# Altium PCB Hilt-Side PCB.PcbDoc
Units mil, origin at the board's own origin, x right, y up, seen from the top; angles counter-clockwise.
Board outline 807.09 x 801.66 mil, 4 copper layers (Top Layer, Mid Layer 1, Mid Layer 2, Bottom Layer), stack 61.811 mil thick; 22 components, 3 nets, 22 pads, 0 vias.
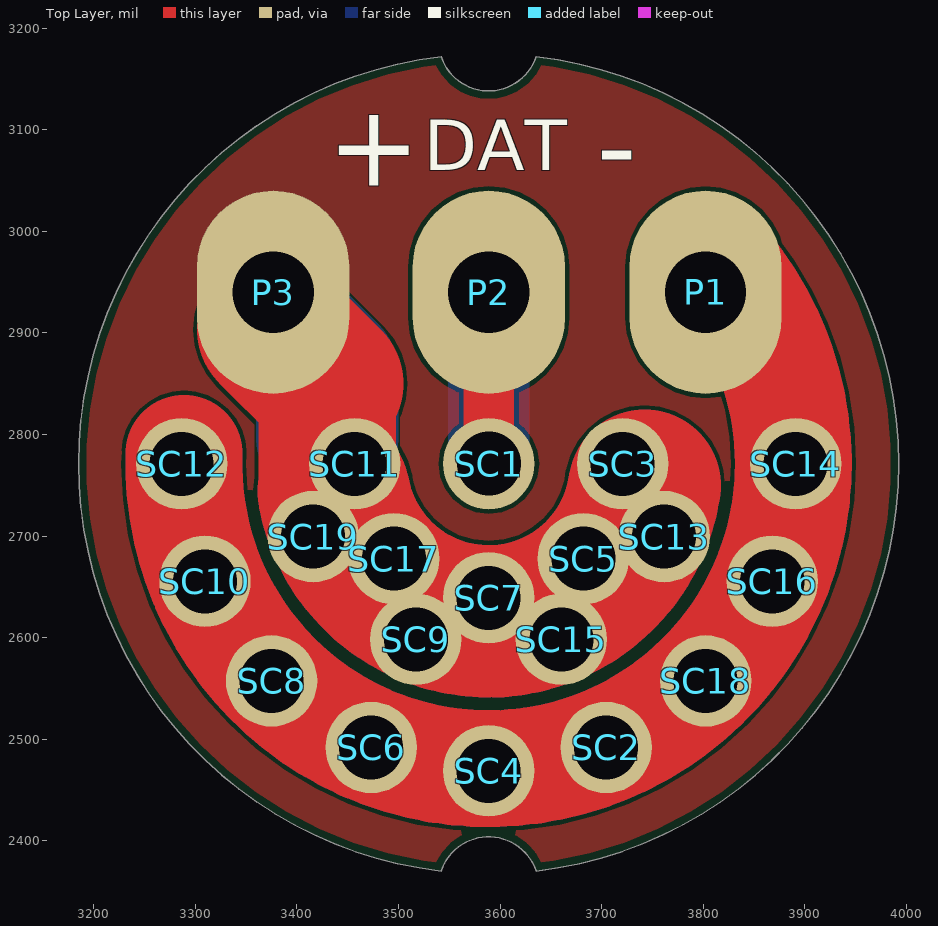
[diagram p0: Top Layer view]
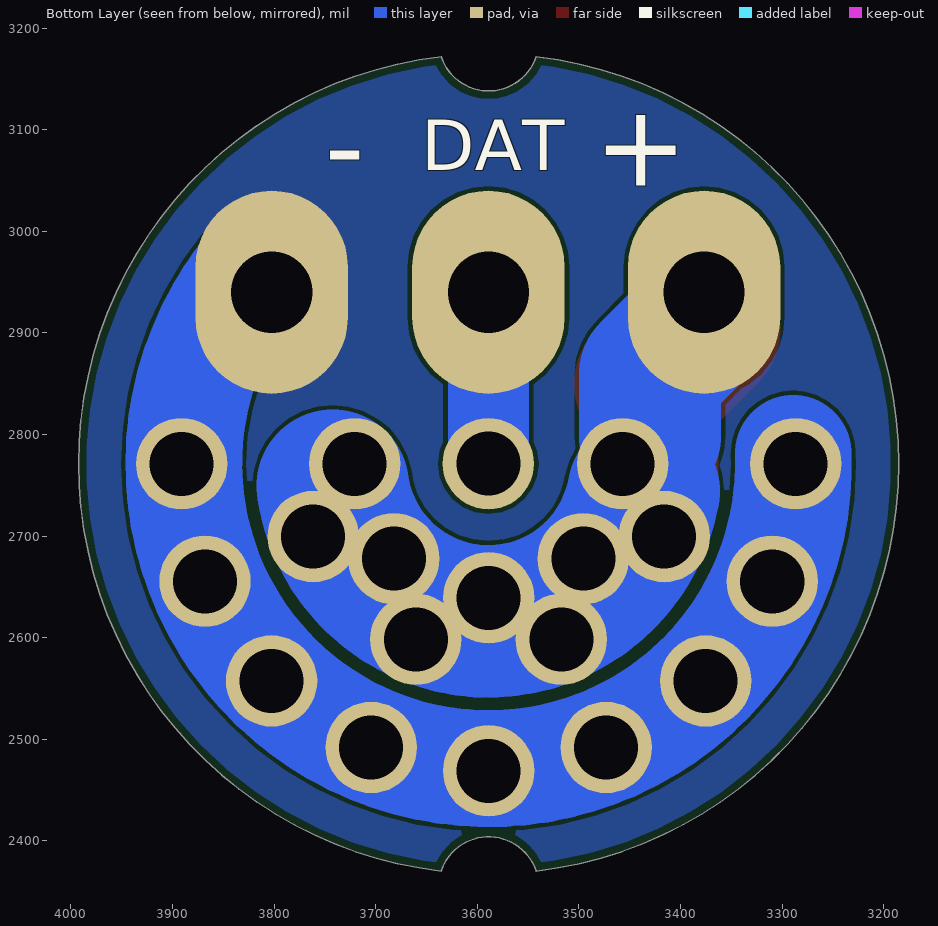
[diagram p1: Bottom Layer view, seen from below]
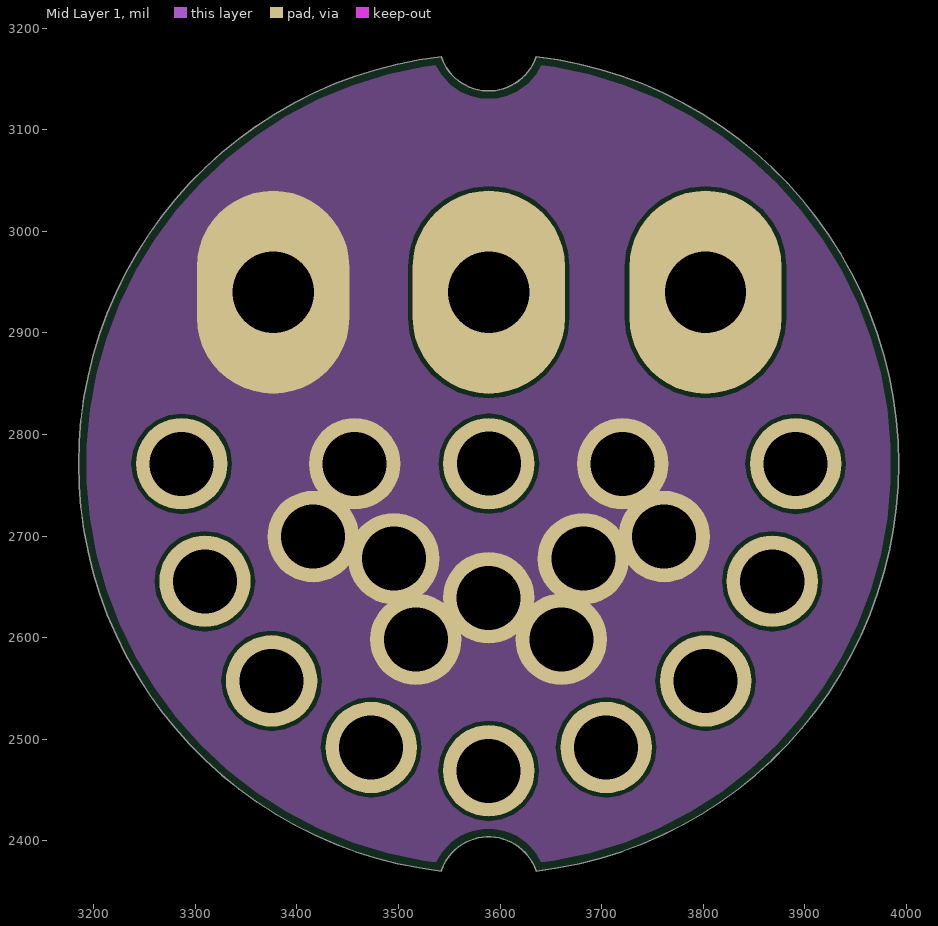
[diagram p2: Mid Layer 1]
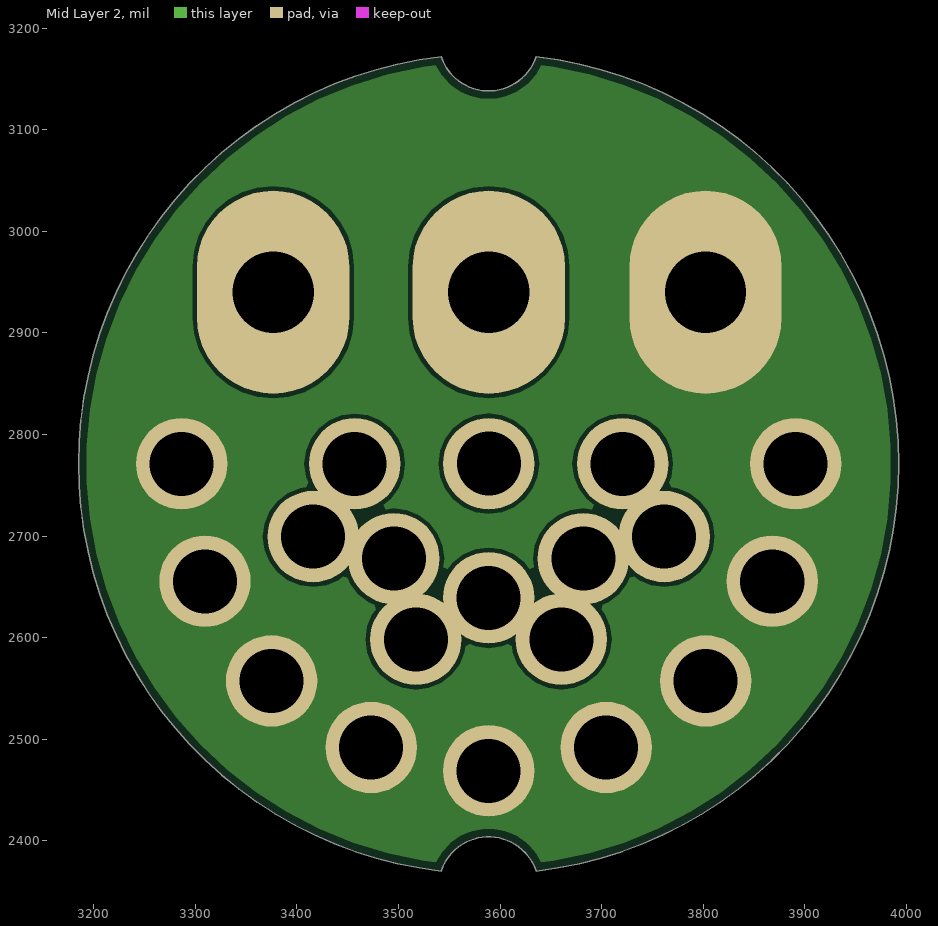
[diagram p3: Mid Layer 2]

## Layer stack, top to bottom
Top Solder: solder mask 0.5, Solder Resist, Dk 3.8
Top Layer: signal copper 1.378
Dielectric 1: prepreg 3.937, 2313, Dk 4.05
Mid Layer 1: signal copper 0.689
Core: core 49.8031, FR-4, Dk 4.5
Mid Layer 2: signal copper 0.689
Dielectric 2: prepreg 3.937, 2313, Dk 4.05
Bottom Layer: signal copper 1.378
Bottom Solder: solder mask 0.5, Solder Resist, Dk 3.8

## Board outline
3542.06,2370.25 cw(c3588.79,2771.08) 3542.06,3171.91 ccw(c3588.79,3187.34) 3635.52,3171.91 cw(c3588.79,2771.08) 3635.52,2370.25 ccw(c3588.79,2354.82)

## Design rules (kind name [scope] priority, off if disabled: settings)
BoardOutlineClearance [All] p1: gap=7.87 ignorepadtopadclearanceinfootprint=FALSE
Clearance [All] p1: gap=4 ignorepadtopadclearanceinfootprint=FALSE except(5: Arc-Via Track-Via SMDPad-Via THPad-Via Via-Via Via-Fill Via-Poly Via-Region Via-Text; 9.84: Arc-Hole Track-Hole SMDPad-Hole THPad-Hole Via-Hole Fill-Hole Poly-Hole Region-Hole Text-Hole)
ComponentClearance [All] p1: gap=4 collisioncheckmode=3 verticalgap=4 showdistances=TRUE
DiffPairsRouting [All] p1: maxlimit=4 minlimit=4 mostfreqgap=4 toplayer_minwidth=4 toplayer_maxwidth=71497.94 toplayer_prefwidth=4 midlayer1_minwidth=4 midlayer1_maxwidth=71497.94 midlayer1_prefwidth=4 midlayer2_minwidth=4 midlayer2_maxwidth=71497.94 midlayer2_prefwidth=4 bottomlayer_minwidth=4 bottomlayer_maxwidth=71497.94 bottomlayer_prefwidth=4 maxuncoupledlength=500
Height [All] p1: minheight=0 maxheight=71497.94 prefheight=500
HoleSize [All] p1: absolutevalues=TRUE maxlimit=248.03 minlimit=7.87 maxpercent=80.000 minpercent=20.000
HoleToHoleClearance [All] p1: gap=9.84 allowstackedmicrovias=FALSE
MinimumAnnularRing [All] p1: minimumring=3
MinimumSolderMaskSliver [All] p1: minsoldermaskwidth=0
PlaneClearance [All] p1: clearance=4
PlaneConnect PlaneConnectPowerPads [InPadClass('PowerPads')] p1: planeconnectstyle=Direct reliefexpansion=20 reliefentries=4 reliefconductorwidth=10 reliefairgap=10
PlaneConnect [All] p2: planeconnectstyle=Direct reliefexpansion=11.81 reliefentries=4 reliefconductorwidth=4 reliefairgap=4
PolygonConnect PolygonConnect_1 [All vs IsNamedPolygon('Top Layer-No Net')] p1: connectstyle=Direct reliefconductorwidth=10 reliefentries=4 polygonreliefangle="90 Angle" airgapwidth=10
PolygonConnect PolygonConnectPowerPads [All vs (InPadClass('PowerPads'))] p2: connectstyle=Direct reliefconductorwidth=10 reliefentries=4 polygonreliefangle="90 Angle" airgapwidth=10
PolygonConnect [All] p3: connectstyle=Direct reliefconductorwidth=4 reliefentries=4 polygonreliefangle="90 Angle" airgapwidth=4
RoutingVias [All] p1: holewidth=7.87 width=17.72 viastyle="Through Hole" minholewidth=7.87 minwidth=17.72 maxholewidth=248.03 maxwidth=257.87
SilkToSilkClearance [All] p1: silktosilkclearance=0
SilkToSolderMaskClearance [IsPad] p1: minsilkscreentomaskgap=4 clearancetoexposedcopper=TRUE
SolderMaskExpansion [All] p1: expansion=2.95 istentingtop=FALSE
Width [All] p1: maxlimit=71497.94 minlimit=4 preferedwidth=4
20 further rules are at their usual default settings.

## Components (designator, comment, footprint, x,y, rotation, side; value= is the part's Value field where it differs from the comment)
P1 "Wire Mount" "Wire Mount" 3802.3,2940 r0 top
P2 "Wire Mount" "Wire Mount" 3589,2940 r0 top
P3 "Wire Mount" "Wire Mount" 3376.72,2940 r0 top
SC1 "Spring Contact" "Spring Contact" 3589,2771.29 r0 top
SC2 "Spring Contact" "Spring Contact" 3704.43,2491.91 r0 top
SC3 "Spring Contact" "Spring Contact" 3720.68,2771.08 r0 top
SC4 "Spring Contact" "Spring Contact" 3588.79,2468.91 r0 top
SC5 "Spring Contact" "Spring Contact" 3682.05,2677.82 r0 top
SC6 "Spring Contact" "Spring Contact" 3473.16,2491.91 r0 top
SC7 "Spring Contact" "Spring Contact" 3588.79,2639.19 r0 top
SC8 "Spring Contact" "Spring Contact" 3375.13,2557.42 r0 top
SC9 "Spring Contact" "Spring Contact" 3517.23,2598.31 r0 top
SC10 "Spring Contact" "Spring Contact" 3309.63,2655.44 r90 top
SC11 "Spring Contact" "Spring Contact" 3456.9,2771.08 r90 top
SC12 "Spring Contact" "Spring Contact" 3286.63,2771.08 r90 top
SC13 "Spring Contact" "Spring Contact" 3761.57,2699.51 r90 top
SC14 "Spring Contact" "Spring Contact" 3890.96,2771.08 r90 top
SC15 "Spring Contact" "Spring Contact" 3660.36,2598.31 r90 top
SC16 "Spring Contact" "Spring Contact" 3867.96,2655.44 r90 top
SC17 "Spring Contact" "Spring Contact" 3495.53,2677.82 r90 top
SC18 "Spring Contact" "Spring Contact" 3802.46,2557.42 r90 top
SC19 "Spring Contact" "Spring Contact" 3416.02,2699.51 r90 top

## Footprints (in the part's own frame and the unit in brackets; to place one, negate y for a bottom-side part, rotate by r counter-clockwise, add the part's x,y. Pads: shape width x height; smd on the part's side, far side on the other; paste and mask are expansions set on the pad)
"Spring Contact" [mil]
  round 90 hole 63 paste+0 mask+10: 1(0,0)
  body extent -39,-39 39,39, height 173
"Wire Mount" [mil]
  oval 150x200 hole 80: 1(0,0)

## Nets (pads, with @x,y where several pads share a name; then routed paths per layer and width w, separated by ;. In a path a pad name is that pad's centre, name@x,y a point inside that pad or via, vN(x,y) a via of type N, cw(c..) or ccw(c..) an arc to the next point about the centre after c; other vN are vias at no path point)
DATA: P2.1 SC1.1 | length 338
  Top Layer w10: SC1.1@3588.79,2771.08 SC1.1
  Top Layer w50: SC1.1 P2.1
  Bottom Layer w5: SC1.1@3588.79,2771.08 SC1.1
  Bottom Layer w80: SC1.1 P2.1
GND: P1.1 SC2.1 SC4.1 SC6.1 SC8.1 SC10.1 SC12.1 SC14.1 SC16.1 SC18.1 | length 2324.8
  Top Layer w115: SC12.1@3288.98,2781.55 ccw(c3588.79,2771.08) P1.1@3818.61,2963.91
  Bottom Layer w115: SC12.1@3288.98,2781.55 ccw(c3588.79,2771.08) P1.1@3818.61,2963.91
VCC: P3.1 SC3.1 SC5.1 SC7.1 SC9.1 SC11.1 SC13.1 SC15.1 SC17.1 SC19.1 | length 1299.1
  Top Layer w10: P3.1@3376.72,2903.28 P3.1 ; SC11.1@3430,2750.31 SC11.1@3436.15,2744.16
  Top Layer w135: SC11.1@3430,2750.31 3430,2850
  Top Layer w150: P3.1@3376.72,2903.28 3430,2850 ; SC11.1@3436.15,2744.16 ccw(c3588.79,2771.08) SC3.1@3742.28,2749.51
  Bottom Layer w5: SC11.1@3430,2797.98 SC11.1
  Bottom Layer w140: P3.1 3376.72,2913.28 3430,2860 SC11.1@3430,2797.98
  Bottom Layer w150: SC11.1@3436.15,2744.16 ccw(c3588.79,2771.08) SC3.1@3742.28,2749.51

## Polygon pours and split planes (outlines as drawn)
VCC on Top Layer "Top Layer-No Net" (solid, remove dead copper, pour order 0): 3542.06,2370.25 cw(c3588.79,2771.08) 3542.06,3171.91 ccw(c3588.79,3187.34) 3635.52,3171.91 cw(c3588.79,2771.08) 3635.52,2370.25 ccw(c3588.79,2354.82)
VCC on Mid Layer 1 "Top Layer-No Net1" (solid, remove dead copper, pour order 1): 3542.06,2370.25 cw(c3588.79,2771.08) 3542.06,3171.91 ccw(c3588.79,3187.34) 3635.52,3171.91 cw(c3588.79,2771.08) 3635.52,2370.25 ccw(c3588.79,2354.82)
GND on Mid Layer 2 "Top Layer-No Net2" (solid, remove dead copper, pour order 2): 3542.06,2370.25 cw(c3588.79,2771.08) 3542.06,3171.91 ccw(c3588.79,3187.34) 3635.52,3171.91 cw(c3588.79,2771.08) 3635.52,2370.25 ccw(c3588.79,2354.82)
GND on Bottom Layer "Top Layer-No Net3" (solid, remove dead copper, pour order 3): 3542.06,2370.25 cw(c3588.79,2771.08) 3542.06,3171.91 ccw(c3588.79,3187.34) 3635.52,3171.91 cw(c3588.79,2771.08) 3635.52,2370.25 ccw(c3588.79,2354.82)

## Silkscreen, mask and mechanical layers (free items; w line width, h text height)
Top Overlay:
  text "DAT" at 3525,3060 h50
  text "+" at 3430,3045 h80
  text "-" at 3695,3045 h80
Bottom Overlay:
  text "DAT" at 3655,3060 h50
  text "+" at 3485,3045 h80
  text "-" at 3750,3045 h80
Mechanical 1:
  circle w0.5: c3588.79,2771.08 r0.2
  circle w0.5: c3517.23,2598.31 r31.5
  circle w0.5: c3588.79,2771.08 r31.5
  circle w0.5: c3761.57,2699.51 r31.5
  circle w0.5: c3802.46,2557.42 r31.5
  circle w0.5: c3375.13,2557.42 r31.5
  circle w0.5: c3309.63,2655.44 r31.5
  circle w0.5: c3704.43,2491.91 r31.5
  circle w0.5: c3720.68,2771.08 r31.5
  circle w0.5: c3588.79,2639.19 r31.5
  circle w0.5: c3495.53,2677.82 r31.5
  circle w0.5: c3456.9,2771.08 r31.5
  circle w0.5: c3682.05,2677.82 r31.5
  circle w0.5: c3867.96,2655.44 r31.5
  circle w0.5: c3473.16,2491.91 r31.5
  circle w0.5: c3286.63,2771.08 r31.5
  circle w0.5: c3588.79,2468.91 r31.5
  circle w0.5: c3890.96,2771.08 r31.5
  circle w0.5: c3660.36,2598.31 r31.5
  circle w0.5: c3416.02,2699.51 r31.5
  lines w0.5: 3542.06,2370.25 cw(c3588.79,2354.82) 3635.52,2370.25 ; 3542.06,3171.91 ccw(c3588.79,3187.34) 3635.52,3171.91
Mechanical 13:
  lines w0.5: 3542.06,2370.25 cw(c3588.79,2771.08) 3542.06,3171.91 ; 3635.52,2370.25 ccw(c3588.79,2771.08) 3635.52,3171.91